# Altium PCB PCB2.PcbDoc (part 1 of 2)
Units mm, origin at the board's own origin, x right, y up, seen from the top; angles counter-clockwise.
Board outline 147.4 x 113.58 mm, 2 copper layers (Top Layer, Bottom Layer); 216 components, 177 nets, 669 pads, 177 vias.
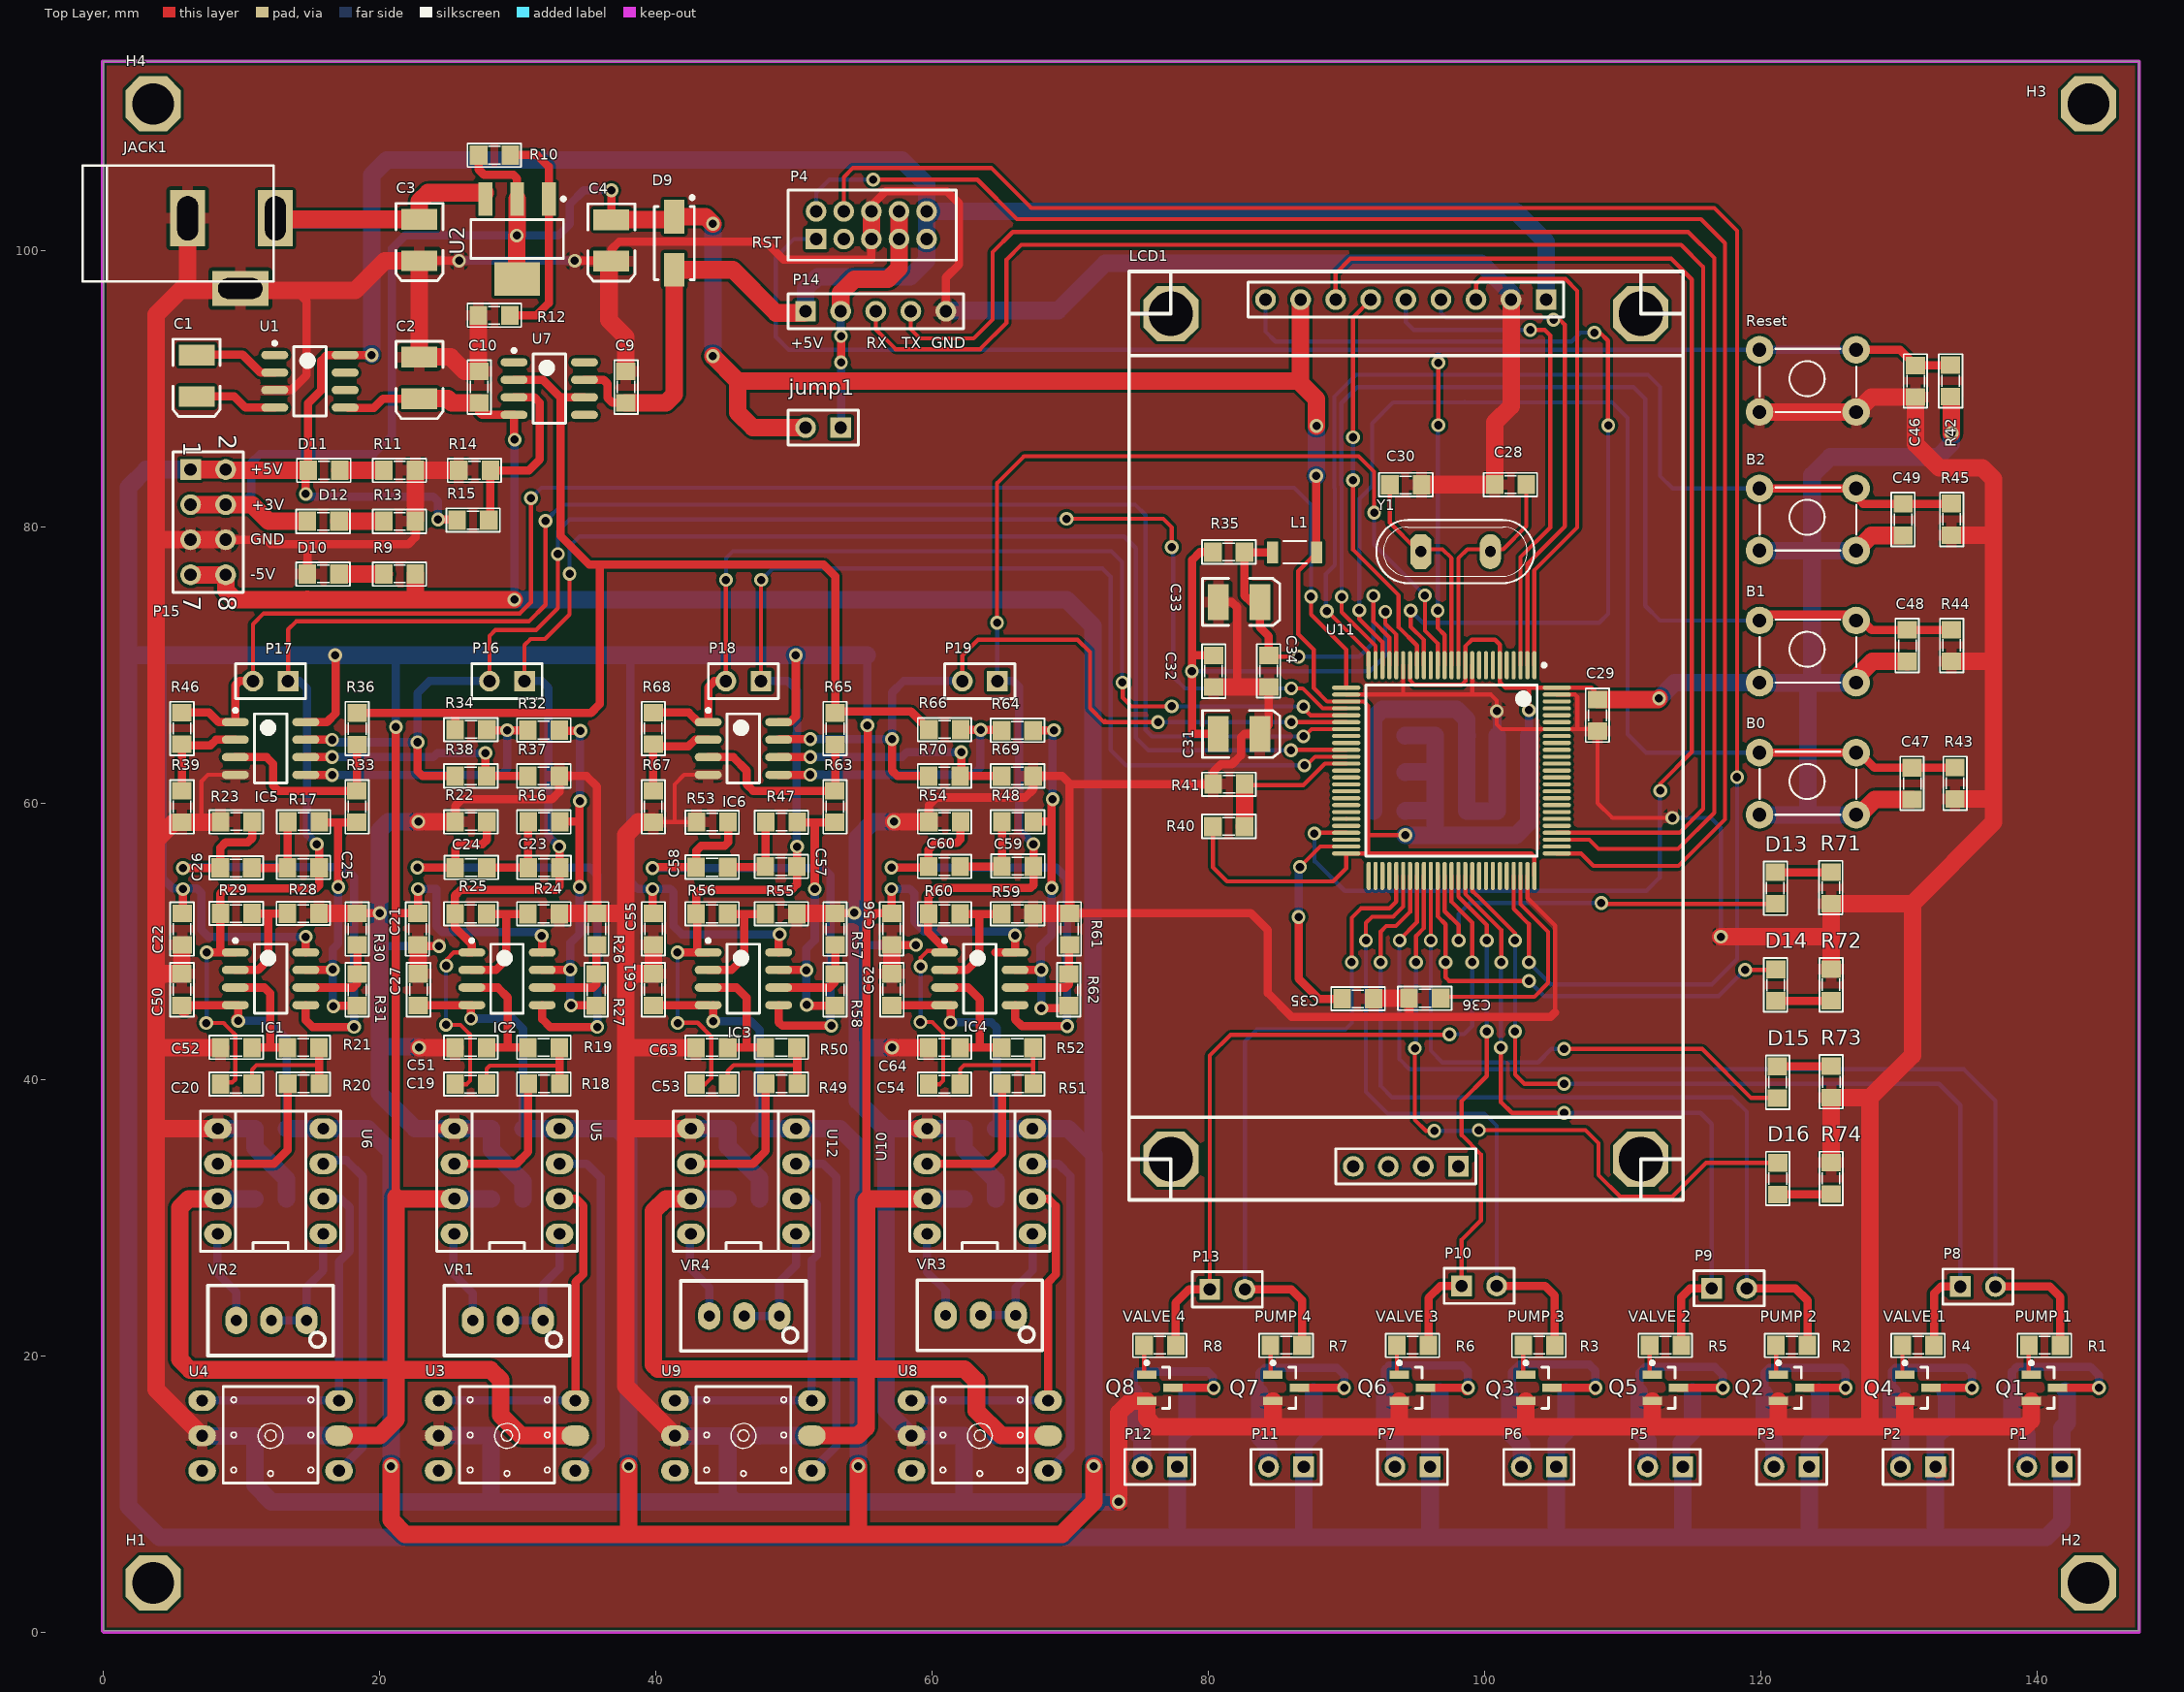
[diagram p0: Top Layer view]
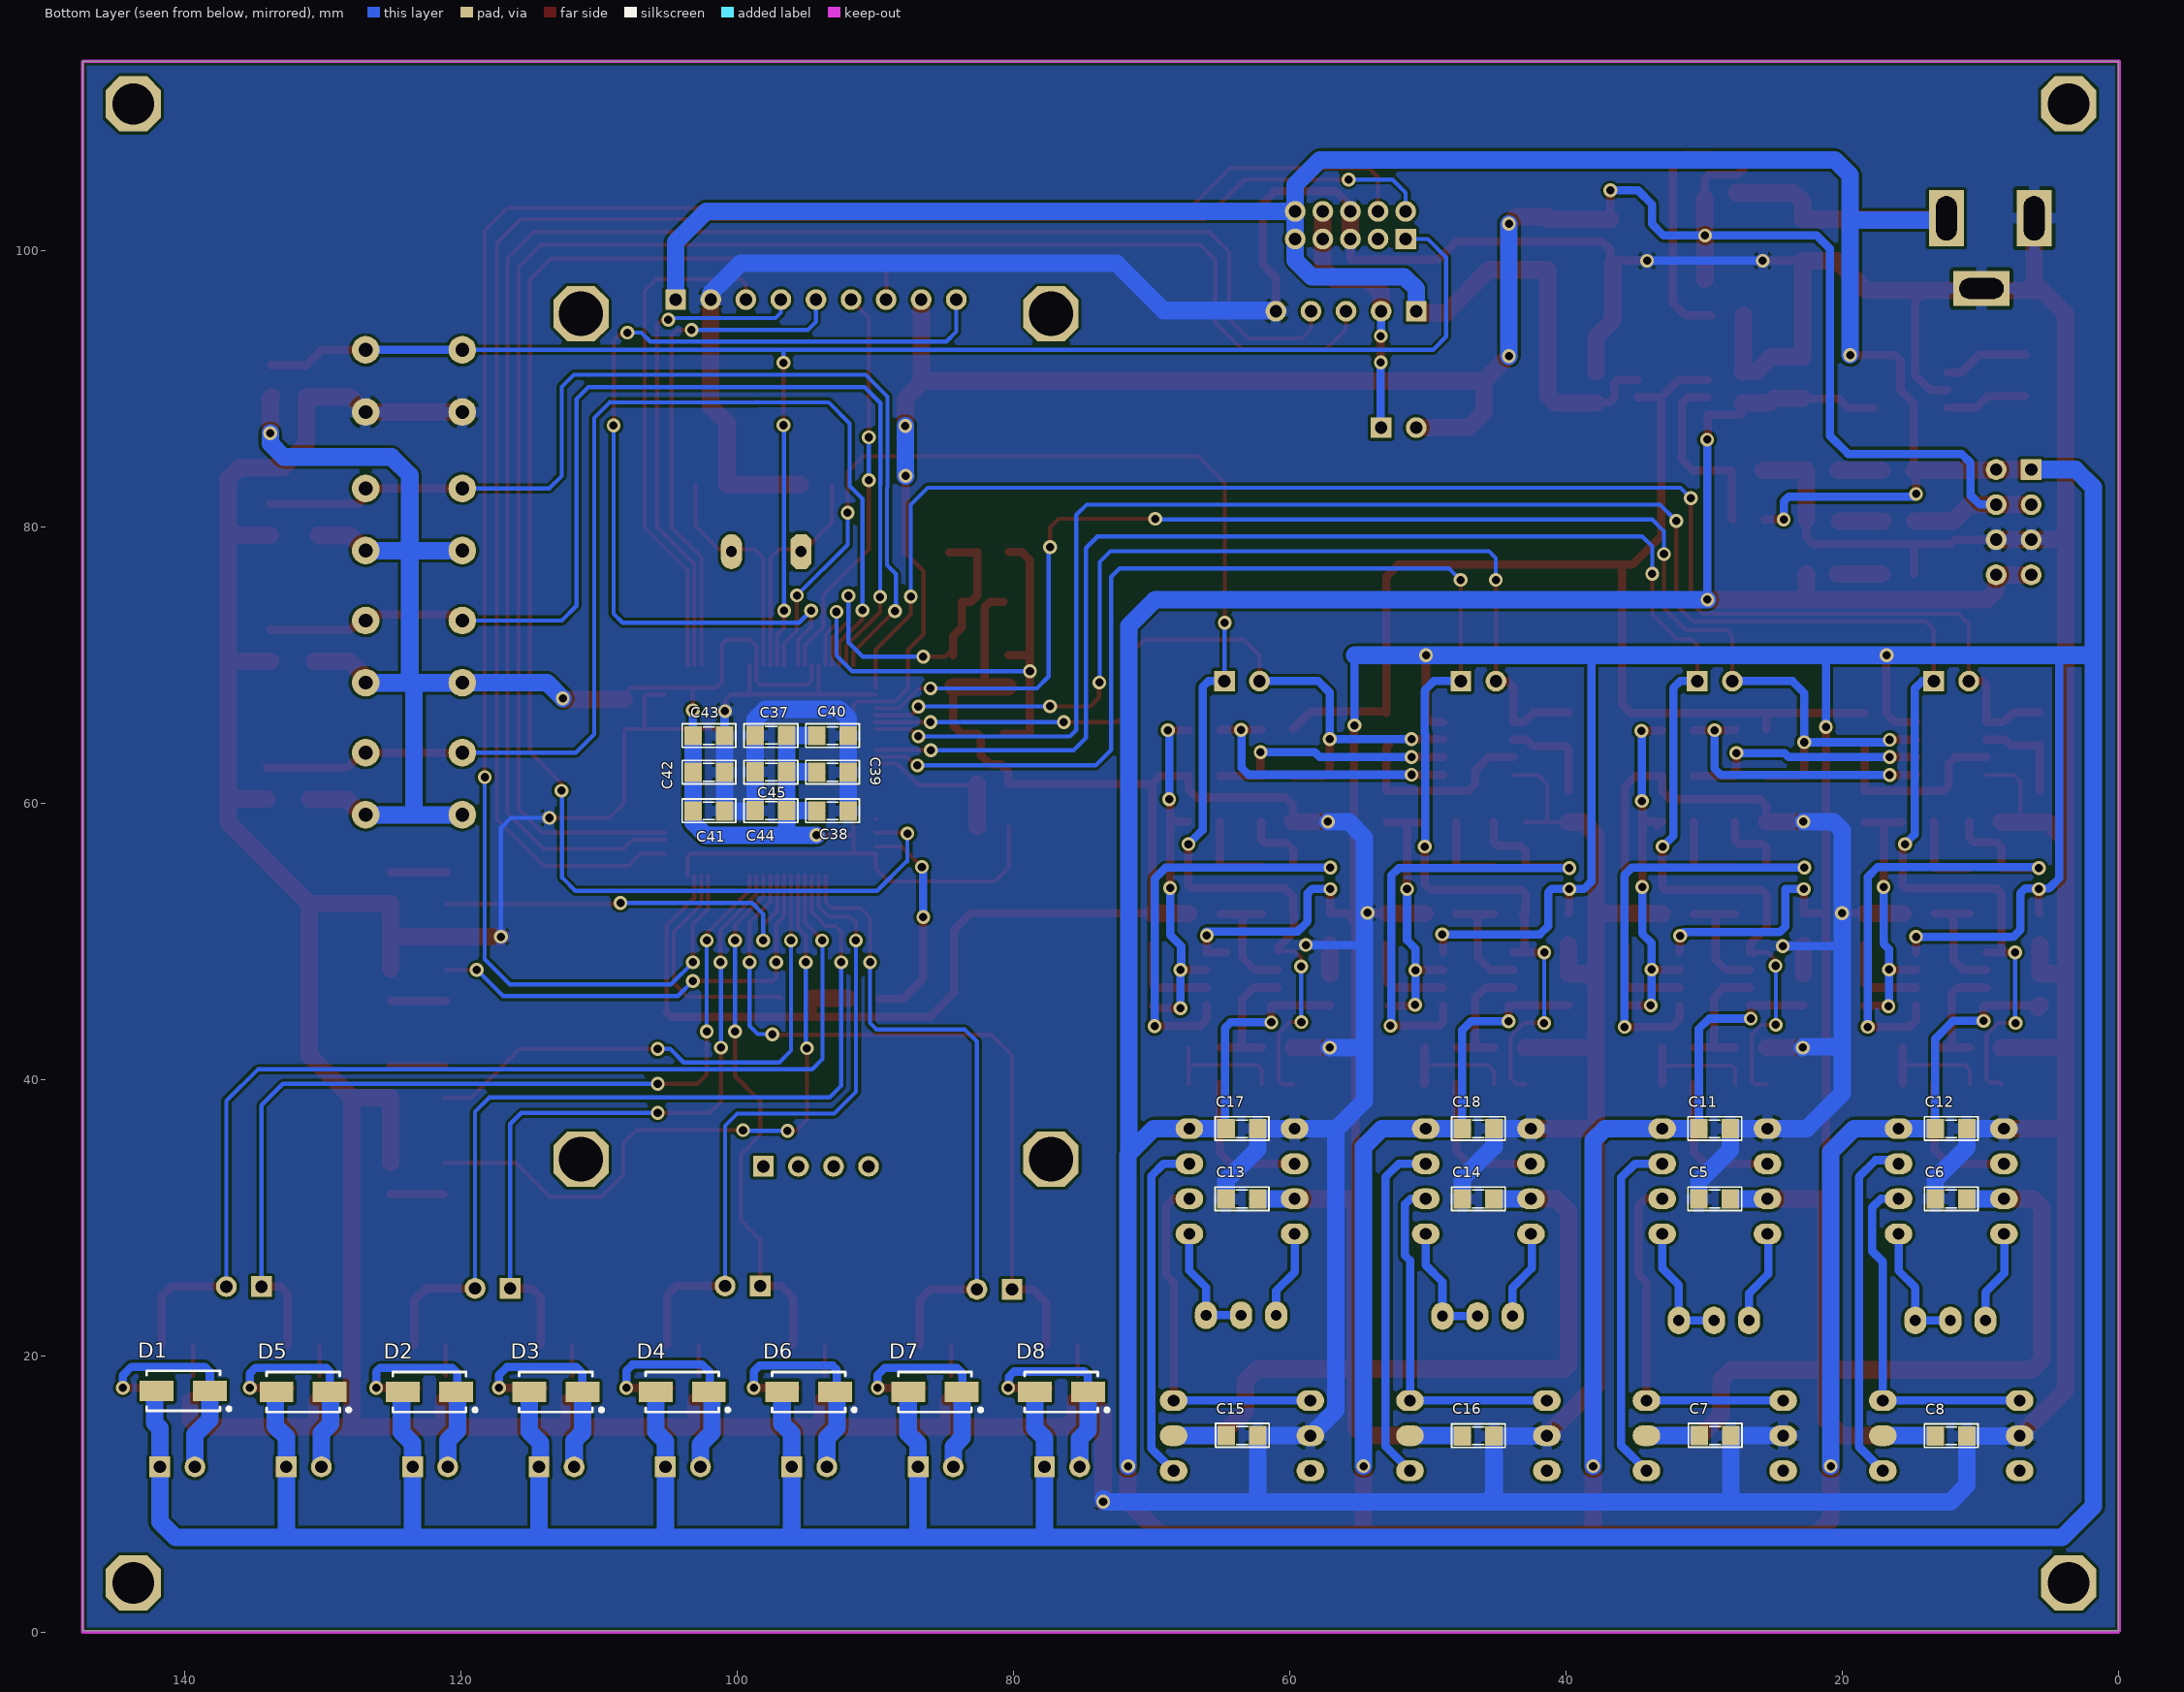
[diagram p1: Bottom Layer view, seen from below]

## Layer stack, top to bottom
Top Solder: solder mask 0.0102, Solder Resist, Dk 3.5
Top Layer: signal copper 0.0356
Dielectric 1: dielectric 0.32, FR-4, Dk 4.8
Bottom Layer: signal copper 0.0356
Bottom Solder: solder mask 0.0102, Solder Resist, Dk 3.5

## Board outline
0,0.1 147.4,0.1 147.4,113.675 0,113.675

## Design rules (kind name [scope] priority, off if disabled: settings)
Clearance Clearance_3 [InNamedPolygon('GND_L01_P006')] p1: gap=0.2 ignorepadtopadclearanceinfootprint=FALSE
Clearance Clearance_2 [InNamedPolygon('GND_L02_P007')] p2: gap=0.2 ignorepadtopadclearanceinfootprint=FALSE
Clearance Clearance_1 [InNamedPolygon('GND_L02_P007')] p3: gap=0.2 ignorepadtopadclearanceinfootprint=FALSE
Clearance [All] p4: gap=0.2 ignorepadtopadclearanceinfootprint=FALSE
PolygonConnect [All] p1: connectstyle=Relief reliefconductorwidth=0.8 reliefentries=4 polygonreliefangle="90 Angle" airgapwidth=0.254
RoutingVias [All] p1: holewidth=0.6 width=1 viastyle="Through Hole" minholewidth=0.6 minwidth=1 maxholewidth=0.6 maxwidth=1
SolderMaskExpansion [All] p1: expansion=0.102
Width [All] p1: maxlimit=1.27 minlimit=0.3 preferedwidth=0.6
30 further rules are at their usual default settings.

## Classes and differential pairs
component class Sheet3: C5 C6 C7 C8 C9 C10 C11 C12 C13 C14 C15 C16 C17 C18 C19 C20 C21 C22 C23 C24 C25 C26 C27 C50 C51 C52 C53 C54 C55 C56 C57 C58 C59 C60 C61 C62 C63 C64 IC1 IC2 IC3 IC4 IC5 IC6 P16 P17 P18 P19 R14 R15 R16 R17 R18 R19 R20 R21 R22 R23 R24 R25 R26 R27 R28 R29 R30 R31 R32 R33 R34 R36 R37 R38 R39 R46 R47 R48 R49 R50 R51 R52 R53 R54 R55 R56 R57 R58 R59 R60 R61 R62 R63 R64 R65 R66 R67 R68 R69 R70 U3 U4 U5 U6 U7 U8 U9 U10 U12 VR1 VR2 VR3 VR4
component class Sheet1: D1 D2 D3 D4 D5 D6 D7 D8 LCD1 P1 P2 P3 P5 P6 P7 P8 P9 P10 P11 P12 P13 Q1 Q2 Q3 Q4 Q5 Q6 Q7 Q8 R1 R2 R3 R4 R5 R6 R7 R8
component class Sheet2: B0 B1 B2 C1 C2 C3 C4 C28 C29 C30 C31 C32 C33 C34 C35 C36 C37 C38 C39 C40 C41 C42 C43 C44 C45 C46 C47 C48 C49 D9 D10 D11 D12 D13 D14 D15 D16 H1 H2 H3 H4 JACK1 jump1 L1 P4 P14 P15 R9 R10 R11 R12 R13 R35 R40 R41 R42 R43 R44 R45 R71 R72 R73 R74 Reset U1 U2 U11 Y1

## Components (designator, comment, footprint, x,y, rotation, side; value= is the part's Value field where it differs from the comment)
B0 "B0" "SW 4PIN" 126.9,59.15 r180 top
B1 "SWITCH" "SW 4PIN" 126.9,68.712 r180 top
B2 "SWITCH" "SW 4PIN" 126.9,78.275 r180 top
C1 "10uF" 3.5X2.8X1.9 6.741,90.925 r270 top
C2 "10uF" 3.5X2.8X1.9 22.875,90.775 r270 top
C3 "0.1uF" 3.5X2.8X1.9 22.875,100.75 r270 top
C4 "1uF" 3.5X2.8X1.9 36.775,100.725 r270 top
C5 "104" "0805 CAP" 29.229,31.342 r0 bottom
C6 "104" "0805 CAP" 12.113,31.342 r0 bottom
C7 "104" "0805 CAP" 29.204,14.223 r0 bottom
C8 "104" "0805 CAP" 12.113,14.197 r0 bottom
C9 "104" "0805 CAP" 37.825,90.115 r90 top
C10 "104" "0805 CAP" 27.197,90.115 r90 top
C11 "104" "0805 CAP" 29.229,36.422 r0 bottom
C12 "104" "0805 CAP" 12.113,36.422 r0 bottom
C13 "104" "0805 CAP" 63.463,31.342 r0 bottom
C14 "104" "0805 CAP" 46.346,31.342 r0 bottom
C15 "104" "0805 CAP" 63.437,14.223 r0 bottom
C16 "104" "0805 CAP" 46.346,14.197 r0 bottom
C17 "104" "0805 CAP" 63.463,36.422 r0 bottom
C18 "104" "0805 CAP" 46.346,36.422 r0 bottom
C19 "1uF" "0805 CAP" 26.593,39.65 r180 top
C20 "1uF" "0805 CAP" 9.607,39.65 r180 top
C21 "104" "0805 CAP" 22.75,50.875 r270 top
C22 "104" "0805 CAP" 5.7,50.875 r270 top
C23 "10uF" "0805 CAP" 31.893,55.325 r180 top
C24 "10uF" "0805 CAP" 26.618,55.325 r180 top
C25 "10uF" "0805 CAP" 14.475,55.325 r180 top
C26 "10uF" "0805 CAP" 9.6,55.3 r180 top
C27 "104" "0805 CAP" 22.8,46.5 r90 top
C28 "20pF" "0805 CAP" 101.872,83.05 r0 top
C29 "104" "0805 CAP" 108.175,66.35 r270 top
C30 "20pF" "0805 CAP" 94.278,83.025 r180 top
C31 "1uF" 3.5X2.8X1.9 82.224,65 r0 top
C32 "100nF" "0805 CAP" 80.376,69.55 r90 top
C33 "1uF" 3.5X2.8X1.9 82.224,74.55 r0 top
C34 "100nF" "0805 CAP" 84.372,69.55 r270 top
C35 "20pF" "0805 CAP" 90.825,45.825 r180 top
C36 "20pF" "0805 CAP" 95.675,45.875 r0 top
C37 "100nF" "0805 CAP" 97.55,64.9 r180 bottom
C38 "100nF" "0805 CAP" 93.1,59.425 r0 bottom
C39 "100nF" "0805 CAP" 93.1,62.225 r0 bottom
C40 "100nF" "0805 CAP" 93.1,64.875 r0 bottom
C41 "100nF" "0805 CAP" 102.05,59.425 r0 bottom
C42 "100nF" "0805 CAP" 102.05,62.225 r0 bottom
C43 "100nF" "0805 CAP" 102.05,64.875 r0 bottom
C44 "100nF" "0805 CAP" 97.55,59.45 r180 bottom
C45 "1uF" "0805 CAP" 97.55,62.25 r180 bottom
C46 "100nF" "0805 CAP" 131.2,90.537 r270 top
C47 "104" "0805 CAP" 130.95,61.413 r270 top
C48 "104" "0805 CAP" 130.6,71.387 r270 top
C49 "104" "0805 CAP" 130.3,80.512 r270 top
C50 "104" "0805 CAP" 5.675,46.5 r90 top
C51 "1uF" "0805 CAP" 26.593,42.3 r180 top
C52 "1uF" "0805 CAP" 9.607,42.3 r180 top
C53 "1uF" "0805 CAP" 44.057,39.65 r180 top
C54 "1uF" "0805 CAP" 60.882,39.65 r180 top
C55 "104" "0805 CAP" 39.825,50.883 r270 top
C56 "104" "0805 CAP" 57.075,50.883 r270 top
C57 "10uF" "0805 CAP" 49.068,55.4 r180 top
C58 "10uF" "0805 CAP" 44.057,55.35 r180 top
C59 "10uF" "0805 CAP" 66.193,55.425 r180 top
C60 "10uF" "0805 CAP" 60.882,55.4 r180 top
C61 "104" "0805 CAP" 39.8,46.5 r90 top
C62 "104" "0805 CAP" 57.075,46.5 r90 top
C63 "1uF" "0805 CAP" 44.057,42.3 r180 top
C64 "1uF" "0805 CAP" 60.882,42.3 r180 top
D1 "Diode" "DIODE SMA" 140.1,17.45 r0 bottom
D2 "Diode" "DIODE SMA" 122.275,17.375 r0 bottom
D3 "Diode" "DIODE SMA" 113.125,17.375 r0 bottom
D4 "Diode" "DIODE SMA" 103.975,17.375 r0 bottom
D5 "Diode" "DIODE SMA" 131.425,17.375 r0 bottom
D6 "Diode" "DIODE SMA" 94.825,17.375 r0 bottom
D7 "Diode" "DIODE SMA" 85.675,17.375 r0 bottom
D8 "Diode" "DIODE SMA" 76.525,17.375 r0 bottom
D9 "1n4002" "DIODE SMA" 41.325,100.525 r270 top
D10 "LED" "LED SMD 0805" 15.925,76.653 r0 top
D11 "LED" "LED SMD 0805" 15.975,84.15 r0 top
D12 "LED" "LED SMD 0805" 15.925,80.463 r0 top
D13 "LED" "LED SMD 0805" 120.981,53.857 r90 top
D14 "LED" "LED SMD 0805" 121.138,46.809 r270 top
D15 "LED" "LED SMD 0805" 121.138,39.807 r90 top
D16 "LED" "LED SMD 0805" 121.294,32.805 r270 top
H1 "HOLE" HOLE 3.6,3.55 r0 top
H2 "HOLE" HOLE 143.725,3.55 r0 top
H3 "HOLE" HOLE 143.725,110.6 r0 top
H4 "HOLE" HOLE 3.6,110.6 r0 top
IC1 "LM358" "SOIC 8PIN" 12.1,47.281 r0 top
IC2 "LM358" "SOIC 8PIN" 29.217,47.281 r0 top
IC3 "LM358" "SOIC 8PIN" 46.333,47.281 r0 top
IC4 "LM358" "SOIC 8PIN" 63.45,47.281 r0 top
IC5 "LM358" "SOIC 8PIN" 12.1,63.95 r0 top
IC6 "LM358" "SOIC 8PIN" 46.333,63.95 r0 top
JACK1 "JACK DC" "JACK DC" 9.275,99.785 r0 top value="Jac DC"
jump1 "Header 2H" HDR1X2 53.375,87.175 r180 top
L1 "100uH" "1206 Negro" 86.25,78.137 r180 top
LCD1 "LCD TFT 2.2\"" "LCD TFT 2.2\"" 104.453,96.441 r180 top
P1 "Pump" HDR1X2 141.795,11.95 r180 top
P2 "Valve" HDR1X2 132.645,11.95 r180 top
P3 "Pump" HDR1X2 123.495,11.95 r180 top
P4 "Header 5X2" "HDR2X5 2mm" 51.597,100.825 r0 top
P5 "Valve" HDR1X2 114.345,11.95 r180 top
P6 "Pump" HDR1X2 105.195,11.95 r180 top
P7 "Valve" HDR1X2 96.045,11.95 r180 top
P8 "Header 2H" HDR1X2 134.44,25 r0 top
P9 "Header 2H" HDR1X2 116.435,24.875 r0 top
P10 "Header 2H" HDR1X2 98.335,25.05 r0 top
P11 "Pump" HDR1X2 86.895,11.95 r180 top
P12 "Valve" HDR1X2 77.745,11.95 r180 top
P13 "Header 2H" HDR1X2 80.1,24.8 r0 top
P14 "Header 5" HDR1X5 50.835,95.6 r0 top
P15 "Header 4X2" HDR2X4 6.311,84.14 r270 top
P16 "Header 2H" HDR1X2 30.487,68.825 r180 top
P17 "Header 2H" HDR1X2 13.365,68.825 r180 top
P18 "Header 2H" HDR1X2 47.603,68.825 r180 top
P19 "Header 2H" HDR1X2 64.72,68.825 r180 top
Q1 "NPN" "SOT23 - 3PIN" 140.525,17.675 r0 top
Q2 "NPN" "SOT23 - 3PIN" 122.225,17.675 r0 top
Q3 "NPN" "SOT23 - 3PIN" 103.925,17.675 r0 top
Q4 "NPN" "SOT23 - 3PIN" 131.375,17.675 r0 top
Q5 "NPN" "SOT23 - 3PIN" 113.075,17.675 r0 top
Q6 "NPN" "SOT23 - 3PIN" 94.775,17.675 r0 top
Q7 "NPN" "SOT23 - 3PIN" 85.625,17.675 r0 top
Q8 "NPN" "SOT23 - 3PIN" 76.475,17.675 r0 top
R1 "220" "0805 RESISTOR" 139.395,20.75 r0 top value="R1/4W - 1K"
R2 "220" "0805 RESISTOR" 121.095,20.75 r0 top value="R1/4W - 1K"
R3 "220" "0805 RESISTOR" 102.795,20.75 r0 top value="R1/4W - 1K"
R4 "220" "0805 RESISTOR" 130.245,20.75 r0 top value="R1/4W - 1K"
R5 "220" "0805 RESISTOR" 111.945,20.75 r0 top value="R1/4W - 1K"
R6 "220" "0805 RESISTOR" 93.645,20.75 r0 top value="R1/4W - 1K"
R7 "220" "0805 RESISTOR" 84.495,20.75 r0 top value="R1/4W - 1K"
R8 "220" "0805 RESISTOR" 75.345,20.75 r0 top value="R1/4W - 1K"
R9 "10k" "0805 RESISTOR" 20.3,76.588 r0 top value="R1/4W - 1K"
R10 "330" "0805 RESISTOR" 27.164,106.9 r0 top value="R1/4W - 1K"
R11 "10k" "0805 RESISTOR" 20.3,84.085 r0 top value="R1/4W - 1K"
R12 "470" "0805 RESISTOR" 29.432,95.3 r180 top value="R1/4W - 1K"
R13 "10k" "0805 RESISTOR" 20.3,80.397 r0 top value="R1/4W - 1K"
R14 "2.2k" "0805 RESISTOR" 25.725,84.085 r0 top value="R1/4W - 1K"
R15 "10k" "0805 RESISTOR" 27.9,80.475 r180 top value="R1/4W - 1K"
R16 "33k" "0805 RESISTOR" 30.75,58.65 r0 top value="R1/4W - 1K"
R17 "33k" "0805 RESISTOR" 13.357,58.65 r0 top value="R1/4W - 1K"
R18 "33k" "0805 RESISTOR" 30.75,39.675 r0 top value="R1/4W - 1K"
R19 "33k" "0805 RESISTOR" 33.011,42.3 r180 top value="R1/4W - 1K"
R20 "33k" "0805 RESISTOR" 13.339,39.675 r0 top value="R1/4W - 1K"
R21 "33k" "0805 RESISTOR" 15.6,42.3 r180 top value="R1/4W - 1K"
R22 "33K" "0805 RESISTOR" 25.475,58.65 r0 top value="R1/4W - 1K"
R23 "33K" "0805 RESISTOR" 8.489,58.65 r0 top value="R1/4W - 1K"
R24 "10k" "0805 RESISTOR" 33.011,51.975 r180 top value="R1/4W - 1K"
R25 "5.6k" "0805 RESISTOR" 27.736,51.975 r180 top value="R1/4W - 1K"
R26 "10k" "0805 RESISTOR" 35.725,52.026 r270 top value="R1/4W - 1K"
R27 "5.6k" "0805 RESISTOR" 35.675,47.618 r270 top value="R1/4W - 1K"
R28 "10k" "0805 RESISTOR" 15.6,52 r180 top value="R1/4W - 1K"
R29 "5.6k" "0805 RESISTOR" 10.75,52 r180 top value="R1/4W - 1K"
R30 "10k" "0805 RESISTOR" 18.375,52.018 r270 top value="R1/4W - 1K"
R31 "5.6k" "0805 RESISTOR" 18.375,47.618 r270 top value="R1/4W - 1K"
R32 "10k" "0805 RESISTOR" 33.011,65.275 r180 top value="R1/4W - 1K"
R33 "10k" "0805 RESISTOR" 18.35,58.599 r90 top value="R1/4W - 1K"
R34 "10k" "0805 RESISTOR" 25.475,65.325 r0 top value="R1/4W - 1K"
R35 "1k" "0805 RESISTOR" 82.611,78.16 r180 top value="R1/4W - 1K"
R36 "10k" "0805 RESISTOR" 18.375,66.525 r270 top value="R1/4W - 1K"
R37 "10k" "0805 RESISTOR" 33.011,61.95 r180 top value="R1/4W - 1K"
R38 "10k" "0805 RESISTOR" 27.736,61.95 r180 top value="R1/4W - 1K"
R39 "10k" "0805 RESISTOR" 5.675,58.599 r90 top value="R1/4W - 1K"
R40 "10k" "0805 RESISTOR" 82.611,58.3 r180 top value="R1/4W - 1K"
R41 "510" "0805 RESISTOR" 80.35,61.375 r0 top value="R1/4W - 1K"
R42 "10k" "0805 RESISTOR" 133.725,89.42 r90 top value="R1/4W - 1K"
R43 "10k" "0805 RESISTOR" 134.05,60.295 r90 top value="R1/4W - 1K"
R44 "10k" "0805 RESISTOR" 133.8,70.27 r90 top value="R1/4W - 1K"
R45 "10k" "0805 RESISTOR" 133.8,79.395 r90 top value="R1/4W - 1K"
R46 "10k" "0805 RESISTOR" 5.675,64.264 r90 top value="R1/4W - 1K"
R47 "33k" "0805 RESISTOR" 47.95,58.625 r0 top value="R1/4W - 1K"
R48 "33k" "0805 RESISTOR" 65.05,58.65 r0 top value="R1/4W - 1K"
R49 "33k" "0805 RESISTOR" 47.95,39.675 r0 top value="R1/4W - 1K"
R50 "33k" "0805 RESISTOR" 50.211,42.3 r180 top value="R1/4W - 1K"
R51 "33k" "0805 RESISTOR" 65.05,39.675 r0 top value="R1/4W - 1K"
R52 "33k" "0805 RESISTOR" 67.311,42.3 r180 top value="R1/4W - 1K"
R53 "33K" "0805 RESISTOR" 42.939,58.625 r0 top value="R1/4W - 1K"
R54 "33K" "0805 RESISTOR" 59.764,58.65 r0 top value="R1/4W - 1K"
R55 "10k" "0805 RESISTOR" 50.211,51.975 r180 top value="R1/4W - 1K"
R56 "5.6k" "0805 RESISTOR" 45.2,51.975 r180 top value="R1/4W - 1K"
R57 "10k" "0805 RESISTOR" 52.975,52.018 r270 top value="R1/4W - 1K"
R58 "5.6k" "0805 RESISTOR" 52.975,47.618 r270 top value="R1/4W - 1K"
R59 "10k" "0805 RESISTOR" 67.311,51.975 r180 top value="R1/4W - 1K"
R60 "5.6k" "0805 RESISTOR" 62.025,51.975 r180 top value="R1/4W - 1K"
R61 "10k" "0805 RESISTOR" 69.95,52.026 r270 top value="R1/4W - 1K"
R62 "5.6k" "0805 RESISTOR" 69.9,47.618 r270 top value="R1/4W - 1K"
R63 "10k" "0805 RESISTOR" 52.95,58.599 r90 top value="R1/4W - 1K"
R64 "10k" "0805 RESISTOR" 67.311,65.25 r180 top value="R1/4W - 1K"
R65 "10k" "0805 RESISTOR" 52.975,66.525 r270 top value="R1/4W - 1K"
R66 "10k" "0805 RESISTOR" 59.764,65.325 r0 top value="R1/4W - 1K"
R67 "10k" "0805 RESISTOR" 39.8,58.599 r90 top value="R1/4W - 1K"
R68 "10k" "0805 RESISTOR" 39.8,64.264 r90 top value="R1/4W - 1K"
R69 "10k" "0805 RESISTOR" 67.311,61.95 r180 top value="R1/4W - 1K"
R70 "10k" "0805 RESISTOR" 62.025,61.95 r180 top value="R1/4W - 1K"
R71 "10k" "0805 RESISTOR" 125.075,55.01 r270 top value="R1/4W - 1K"
R72 "10k" "0805 RESISTOR" 125.075,45.702 r90 top value="R1/4W - 1K"
R73 "10k" "0805 RESISTOR" 125.1,40.96 r270 top value="R1/4W - 1K"
R74 "10k" "0805 RESISTOR" 125.075,31.697 r90 top value="R1/4W - 1K"
Reset "" "SW 4PIN" 126.9,88.3 r180 top
U1 "ICL7660" "SOIC 8PIN" 14.95,90.525 r0 top
U2 "LM317" SOT223-4N 29.95,100.825 r270 top
U3 "MPS20N0040D" MPS20N0040D-S 24.264,11.67 r90 top
U4 "MPS20N0040D" MPS20N0040D-S 7.147,11.67 r90 top
U5 "INA-129" "DIP 8" 29.217,32.625 r90 top
U6 "INA-129" "DIP 8" 12.1,32.625 r90 top
U7 "LM741" "SOIC 8PIN" 32.275,90 r0 top
U8 "MPS20N0040D" MPS20N0040D-S 58.497,11.67 r90 top
U9 "MPS20N0040D" MPS20N0040D-S 41.38,11.67 r90 top
U10 "INA-129" "DIP 8" 63.45,32.625 r90 top
U11 "STM32F40xxx-LQFP100" "LQFP 100PIN" 97.6,62.35 r270 top
U12 "INA-129" "DIP 8" 46.333,32.625 r90 top
VR1 "10K" RVAR 29.28,22.55 r180 top value="VR 10K"
VR2 "10K" RVAR 12.164,22.55 r180 top value="VR 10K"
VR3 "10K" RVAR 63.514,22.925 r180 top value="VR 10K"
VR4 "10K" RVAR 46.397,22.875 r180 top value="VR 10K"
Y1 "8Mhz" "CRYSTAL DIP" 97.875,78.2 r0 top

## Footprints (in the part's own frame and the unit in brackets; to place one, negate y for a bottom-side part, rotate by r counter-clockwise, add the part's x,y. Pads: shape width x height; smd on the part's side, far side on the other; paste and mask are expansions set on the pad)
3.5X2.8X1.9 [mm] "SM LED; 2 C-Bend Leads; Body 3.5 x 2.8 x 1.9 mm, inc leads (LxWxH typ)"
  rect 1.5x2.6 smd: 1(-1.5,0) 2(1.5,0)
  silkscreen extent -2.65,-1.7 2.95,1.7
"0805 CAP" [mil] "Compoment SMD 80x50mil"
  rect 50x55 smd: 1(-45,0) 2(45,0)
  silkscreen extent -77,-34 76,33, body extent -40,-25 40,25, height 24
"0805 RESISTOR" [mil] "Compoment SMD 80x50mil"
  rect 50x55 smd: 1(0,0) 2(90,0)
  silkscreen extent -32,-34 121,33, body extent 6,-25 84,25, height 24
"1206 Negro" [mm] "Chip Resistor, Empaque 1206"
  rect 0.8x1.6 smd: 1(-1.6,0) 2(1.6,0)
  silkscreen extent -0.85,-0.82 0.82,0.8, body extent -1.6,-0.8 1.6,0.8, height 1
"CRYSTAL DIP" [mm]
  oct 1.524x2.54 hole 0.8: 1(-2.5,0)
  oval 1.524x2.54 hole 0.8: 2(2.54,0)
  silkscreen extent -5.71,-2.29 5.71,2.29, body extent -5.63,-2.35 5.72,2.3, height 3.5
"DIODE SMA" [mm]
  rect 2.45x1.5 smd: 1(-1.925,0) 2(1.925,0)
  silkscreen extent -3.42,-1.45 2.65,1.45, body extent -2.8,-1.48 2.8,1.47, height 2.7
"DIP 8" [mm] "W.300/L.400"
  oval 1.5x2 hole 0.864: 1(-3.81,-3.81) 2(-1.27,-3.81) 3(1.27,-3.81) 4(3.81,-3.81) 5(3.81,3.81) 6(1.27,3.81) 7(-1.27,3.81) 8(-3.81,3.81)
  silkscreen extent -5.08,-5.08 5.08,5.08, body extent -5.4,-3.88 5.4,3.88, height 4.5
HDR1X2 [mm] "Connector; Header; 2 Position"
  rect 1.5x1.5 hole 0.9: 1(0,0)
  round 1.5 hole 0.9: 2(2.54,0)
  silkscreen extent -1.27,-1.27 3.81,1.27
HDR1X5 [mm] "Connector; Header; 5 Position"
  rect 1.5x1.5 hole 0.9: 1(0,0)
  round 1.5 hole 0.9: 2(2.54,0) 3(5.08,0) 4(7.62,0) 5(10.16,0)
  silkscreen extent -1.27,-1.27 11.43,1.27
HDR2X4 [mm] "Connector; Header; 4x2 Position"
  rect 1.5x1.5 hole 0.9: 1(0,0)
  round 1.5 hole 0.9: 2(0,2.54) 3(2.54,0) 4(2.54,2.54) 5(5.08,0) 6(5.08,2.54) 7(7.62,0) 8(7.62,2.54)
  silkscreen extent -1.27,-1.27 8.89,3.81
"HDR2X5 2mm" [mm] "Connector; Header; 5x2 Position"
  rect 1.5x1.5 hole 0.9: 1(0,0)
  round 1.5 hole 0.9: 2(0,2) 3(2,0) 4(2,2) 5(4,0) 6(4,2) 7(6,0) 8(6,2) 9(8,0) 10(8,2)
  silkscreen extent -2.03,-1.52 10.16,3.56, body extent -1.94,-1.48 10.06,3.52, height 6.6
HOLE [mm]
  oct 4x4 hole 3: H(0,0)
"JACK DC" [mm] "Jac DC input"
  rect 2.54x4.064 hole 1.5 slot 3.2 at 90 deg: 1(3.175,2.54) 2(-3.175,2.54)
  rect 4.064x2.54 hole 1.5 slot 3.2 at 0 deg: 3(0.635,-2.54)
  silkscreen extent -10.79,-2.03 3.05,6.35, body extent -10.42,-2.67 3.4,6.84, height 11.02
"LCD TFT 2.2\"" [mm]
  rect 1.5x1.5 hole 0.9: 1(0,0) 10(6.35,62.738)
  round 1.5 hole 0.9: 2(2.54,0) 3(5.08,0) 4(7.62,0) 5(10.16,0) 6(12.7,0) 7(15.24,0) 8(17.78,0) 9(20.32,0) 11(8.89,62.738) 12(11.43,62.738) 13(13.97,62.738)
  oct 4x4 hole 3.2: ""(-6.858,62.216) ""(-6.858,1.016) ""(27.178,62.216) ""(27.178,1.016)
  silkscreen extent -9.91,-2.03 30.19,65.17, body extent -9.89,-2.03 30.21,65.17, height 12
"LED SMD 0805" [mil] "Compoment SMD 80x50mil"
  rect 50x55 smd: 1(-45.39,-2.58) 2(44.61,-2.58)
  silkscreen extent -77,-37 76,30, body extent -41,-21 41,15, height 33
"LQFP 100PIN" [mm] "TSQFP, 100-Leads, Body 16.2x16.2mm (max), Pitch 0.50mm, IPC Low Density"
  oval 2.05x0.3 smd: 1(-7.625,6) 2(-7.625,5.5) 3(-7.625,5) 4(-7.625,4.5) 5(-7.625,4) 6(-7.625,3.5) 7(-7.625,3) 8(-7.625,2.5) 9(-7.625,2) 10(-7.625,1.5) 11(-7.625,1) 12(-7.625,0.5) 13(-7.625,0) 14(-7.625,-0.5) 15(-7.625,-1) 16(-7.625,-1.5) 17(-7.625,-2) 18(-7.625,-2.5) 19(-7.625,-3) 20(-7.625,-3.5) 21(-7.625,-4) 22(-7.625,-4.5) 23(-7.625,-5) 24(-7.625,-5.5) 25(-7.625,-6) 51(7.625,-6) 52(7.625,-5.5) 53(7.625,-5) 54(7.625,-4.5) 55(7.625,-4) 56(7.625,-3.5) 57(7.625,-3) 58(7.625,-2.5) 59(7.625,-2) 60(7.625,-1.5) 61(7.625,-1) 62(7.625,-0.5) 63(7.625,0) 64(7.625,0.5) 65(7.625,1) 66(7.625,1.5) 67(7.625,2) 68(7.625,2.5) 69(7.625,3) 70(7.625,3.5) 71(7.625,4) 72(7.625,4.5) 73(7.625,5) 74(7.625,5.5) 75(7.625,6)
  oval 0.3x2.05 smd: 26(-6,-7.625) 27(-5.5,-7.625) 28(-5,-7.625) 29(-4.5,-7.625) 30(-4,-7.625) 31(-3.5,-7.625) 32(-3,-7.625) 33(-2.5,-7.625) 34(-2,-7.625) 35(-1.5,-7.625) 36(-1,-7.625) 37(-0.5,-7.625) 38(0,-7.625) 39(0.5,-7.625) 40(1,-7.625) 41(1.5,-7.625) 42(2,-7.625) 43(2.5,-7.625) 44(3,-7.625) 45(3.5,-7.625) 46(4,-7.625) 47(4.5,-7.625) 48(5,-7.625) 49(5.5,-7.625) 50(6,-7.625) 76(6,7.625) 77(5.5,7.625) 78(5,7.625) 79(4.5,7.625) 80(4,7.625) 81(3.5,7.625) 82(3,7.625) 83(2.5,7.625) 84(2,7.625) 85(1.5,7.625) 86(1,7.625) 87(0.5,7.625) 88(0,7.625) 89(-0.5,7.625) 90(-1,7.625) 91(-1.5,7.625) 92(-2,7.625) 93(-2.5,7.625) 94(-3,7.625) 95(-3.5,7.625) 96(-4,7.625) 97(-4.5,7.625) 98(-5,7.625) 99(-5.5,7.625) 100(-6,7.625)
  silkscreen extent -7.75,-6.2 6.2,6.83, body extent -8.07,-8.07 8.07,8.07, height 1.62
MPS20N0040D-S [mm]
  oval 1.5x2 hole 0.864: 1(5.08,-9.906) 3(0,-9.906) 4(0,0) 5(2.54,0) 6(5.08,0)
  oval 1.5x2 all layers, no hole: 2(2.54,-9.906)
  silkscreen extent -0.89,-8.38 6.1,-1.52, body extent -0.96,-10.1 6.04,0.2, height 10
RVAR [mm] "Bien tro vi chinh"
  oval 1.6x2 hole 0.8: 1(-2.54,0) 2(0,0) 3(2.54,0)
  silkscreen extent -4.47,-2.54 4.6,2.54, body extent -4.54,-2.4 4.66,2.4, height 12.02
"SOIC 8PIN" [mm]
  oval 1.95x0.6 smd: 1(-2.55,1.905) 2(-2.55,0.635) 3(-2.55,-0.635) 4(-2.55,-1.905) 5(2.55,-1.905) 6(2.55,-0.635) 7(2.55,0.635) 8(2.55,1.905)
  silkscreen extent -2.67,-2.5 1.17,2.88, body extent -3,-2.45 3,2.45, height 1.75
"SOT23 - 3PIN" [mm]
  rect 1.4x0.6 smd: 1(-0.95,-0.95) 2(0.95,0) 3(-0.95,0.95)
  silkscreen extent -1.07,-1.5 0.7,1.92, body extent -1.4,-1.45 1.4,1.45, height 1.29
SOT223-4N [mm] "SOT223, 4-Leads, Body 6.5x3.5mm, Pitch 2.3mm, Lead Span 7mm, IPC Medium Density"
  rect 2.4x1 smd: 1(-2.9,2.3) 2(-2.9,0) 3(-2.9,-2.3)
  rect 2.4x3.3 smd: 4(2.9,0)
  silkscreen extent -3.02,-3.35 1.4,3.48, body extent -3.39,-3.27 3.5,3.23, height 1.72
"SW 4PIN" [mm] "SW button 4pin, 250 x250 mil"
  round 2 hole 1: 1(0,0) 1(7,0) 2(0,-4.5) 2(7,-4.5)
  silkscreen extent 0,-4.57 6.98,0, body extent -0.52,-5.39 7.38,0.81, height 7

## Part data
B0 Reset: library part SWITCH, LatestRevisionDate=17-Jul-2002, LatestRevisionNote="Re-released for DXP Platform.", PackageReference=SPST-2, Published=24-Mar-1999, Publisher="Altium Limited"
C1 C2 C3 C4 C31 C33: library part CAPACITOR
C5 C6 C7 C8 C9 C10 C11 C12 C13 C14 C15 C16 C17 C18 C19 C20 C21 C22 C23 C24 C25 C26 C27 C28 C29 C30 C32 C34 C35 C36 C37 C38 C39 C40 C41 C42 C43 C44 C45 C46 C47 C48 C49 C50 C51 C52 C53 C54 C55 C56 C57 C58 C59 C60 C61 C62 C63 C64: library part "CAP CERAMIC", LatestRevisionDate=17-Jul-2002, LatestRevisionNote="Re-released for DXP Platform.", PackageReference=RAD-0.3, Published=8-Jun-2000, Publisher="Altium Limited"
D1 D2 D3 D4 D5 D6 D7 D8 D9: library part DIODE
IC1 IC2 IC3 IC4 IC5 IC6: "Low-Power Dual Operational Amplifier"
L1: library part INDUCTOR
P1 P2 P3 P5 P6 P7 P11 P12: library part "Header 2H", LatestRevisionDate=17-Jul-2002, LatestRevisionNote="Re-released for DXP Platform.", Publisher="Altium Limited"
R1 R2 R3 R4 R5 R6 R7 R8 R9 R10 R11 R12 R13 R14 R15 R16 R17 R18 R19 R20 R21 R22 R23 R24 R25 R26 R27 R28 R29 R30 R31 R32 R33 R34 R35 R36 R37 R38 R39 R40 R41 R42 R43 R44 R45 R46 R47 R48 R49 R50 R51 R52 R53 R54 R55 R56 R57 R58 R59 R60 R61 R62 R63 R64 R65 R66 R67 R68 R69 R70 R71 R72 R73 R74: library part RESISTOR
U1: library part ICL7660SIBAZ, "ICL7660 Series 1.5 - 12 Vin 45 mA 10-35 kHz CMOS Voltage Converter - SOIC-8", Package="SOIC-8 Intersil", Availability=Unavailable, MF="Renesas Electronics", MP=ICL7660SIBAZ, Price=None, SnapEDA_Link=https://www.snapeda.com/parts/ICL7660SIBAZ/Renesas%20Electronics%20America%20Inc./view-part/?ref=snap
VR1 VR2 VR3 VR4: library part "VAR RES"
Y1: library part Crystal, LatestRevisionDate=17-Jul-2002, LatestRevisionNote="Re-released for DXP Platform.", PackageReference=R38, Published=8-Jun-2000, Publisher="Altium Limited"
B1 B2: LatestRevisionDate=17-Jul-2002, LatestRevisionNote="Re-released for DXP Platform.", PackageReference=SPST-2, Published=24-Mar-1999, Publisher="Altium Limited"
jump1 P4 P8 P9 P10 P13 P14 P15 P16 P17 P18 P19: LatestRevisionDate=17-Jul-2002, LatestRevisionNote="Re-released for DXP Platform.", Publisher="Altium Limited"

## Via types
v1: diameter 1, hole 0.6, Top Layer to Bottom Layer, 177 vias

## Nets (pads, with @x,y where several pads share a name; then routed paths per layer and width w, separated by ;. In a path a pad name is that pad's centre, name@x,y a point inside that pad or via, vN(x,y) a via of type N, cw(c..) or ccw(c..) an arc to the next point about the centre after c; other vN are vias at no path point)
+3.3V: jump1.1 P4.7 P4.8 P14.2 | length 18.8
  Top Layer w0.6: v1(53.4,91.9) v1(53.4,93.8)
  Top Layer w1.27: P14.2@53.375,95.6 53.375,96.925 54.375,97.925 56.8,97.925 57.597,98.722 P4.7@57.597,100.825 P4.8@57.597,102.825
  Bottom Layer w0.6: jump1.1@53.375,87.175 53.4,87.2 v1(53.4,91.9) ; P14.2@53.375,95.6 53.375,93.975 53.4,93.95 v1(53.4,93.8)
+3V: B0.1 B1.1 B2.1 C4.1 C29.1 C37.2 C38.2 C39.2 C40.2 C41.2 C42.2 C43.2 C44.2 C45.2 C47.2 C48.2 C49.2 D9.1 D12.1 jump1.2 L1.1 LCD1.8 P15.3 P15.4 R10.1 R40.2 R42.1 U2.2 U2.4 U11.6 U11.11 U11.19 U11.28 U11.50 U11.75 U11.100 | length 353.5
  Top Layer w0.3: R40.2@80.325,58.3 80.325,55.35 81.35,54.325 89.025,54.325 89.975,55.275 U11.50@89.975,56.35 91.575,56.35 ; L1.1@87.85,78.137 86.5,76.787 86.5,72.225 87.625,71.1 87.625,68.325 88.6,67.35 U11.28@89.975,67.35 91.25,67.35 91.575,67.025 91.575,57.7 ; v1(94.25,57.675) 91.6,57.675 91.575,57.7 ; U11.19@94.6,69.975 94.6,68.893 94.943,68.55 98.325,68.55 98.6,68.825 U11.11@98.6,69.975 98.6,71.35 99.075,71.825 100.75,71.825 101.1,71.475 U11.6@101.1,69.975 101.1,68.75 101.5,68.35 103.175,68.35 ; v1(103.2,66.725) 103.2,68.325 103.175,68.35 ; U11.75@103.6,54.725 103.6,56.125 103.375,56.35 91.575,56.35 ; C29.1@108.175,67.493 108.175,67.9 107.725,68.35 U11.100@105.225,68.35 103.175,68.35 ; 91.575,56.35 91.575,57.7
  Top Layer w0.6: R10.1@27.164,106.9 27.164,105.861 27.55,105.475 29.675,105.475 29.95,105.2 29.95,104.175 U2.2@29.925,104.15 ; C4.1@36.775,102.225 v1(36.775,104.35) ; v1(87.8,83.675) 87.8,78.187 L1.1@87.85,78.137
  Top Layer w1.27: P15.3@6.311,81.6 P15.4@8.851,81.6 10.75,81.6 11.953,80.397 D12.1@14.772,80.397 ; U2.4@29.95,97.925 29.925,97.95 v1(29.925,101.075) 29.95,101.1 U2.2@29.95,103.725 ; C4.1@36.775,102.225 D9.1@41.325,102.225 ; D9.1@41.325,102.45 43.6,102.45 v1(44.125,101.925) ; v1(44.125,92.35) 45.925,90.55 ; jump1.2@50.835,87.175 47.025,87.175 45.925,88.275 45.925,90.55 ; LCD1.8@86.673,96.441 86.673,90.398 ; v1(87.825,87.3) 87.825,89.246 86.673,90.398 ; C29.1@108.175,67.493 112.543,67.493 v1(112.625,67.575) ; B1.1@126.9,69.15 126.95,69.15 128.075,70.275 130.569,70.275 C48.2@130.6,70.244 ; B2.1@126.9,78.275 127.994,79.369 C49.2@130.3,79.369 ; B0.1@127.125,59.15 128.245,60.27 C47.2@130.95,60.27 ; R42.1@133.725,89.42 133.8,89.345 v1(133.8,86.775) ; 45.925,90.55 86.521,90.55 86.673,90.398
  Bottom Layer w0.6: P15.4@8.851,81.6 10.025,81.6 10.7,82.275 10.7,84.625 11.35,85.275 19.575,85.275 20.875,86.575 20.875,100.125 21.825,101.075 v1(29.925,101.075) 32.925,101.075 33.775,101.925 33.775,103.35 34.775,104.35 v1(36.775,104.35) ; v1@87.8,87.275 v1(87.825,87.3) ; C43.2@103.193,64.875 103.193,66.718 v1(103.2,66.725)
  Bottom Layer w1.27: v1(44.125,92.35) v1(44.125,101.925) ; v1(87.8,83.675) 87.825,83.7 v1(87.825,87.3) ; C38.2@94.243,59.425 94.268,59.45 C44.2@96.407,59.45 ; C39.2@94.243,62.225 94.268,62.25 C45.2@96.407,62.25 ; C40.2@94.243,64.875 94.268,64.9 C37.2@96.407,64.9 C45.2@96.407,62.25 ; v1(94.25,57.675) 96.75,57.675 ; C43.2@103.193,64.875 C42.2@103.193,62.225 C41.2@103.193,59.425 103.193,58.593 102.275,57.675 96.75,57.675 ; v1(112.625,67.575) 113.762,68.712 B1.1@119.9,68.712 119.912,68.7 123.7,68.7 ; B2.1@119.9,78.275 123.7,78.275 ; B0.1@120.125,59.15 123.4,59.15 123.4,68.4 123.7,68.7 ; 123.7,59.15 B0.1@127.125,59.15 ; B1.1@126.9,68.7 123.7,68.7 ; B2.1@126.9,78.275 123.7,78.275 ; v1(133.8,86.775) 133.8,86.025 132.825,85.05 125.025,85.05 123.7,83.725 123.7,78.275 ; C44.2@96.407,59.45 96.407,58.018 96.75,57.675 ; C44.2@96.407,59.45 C45.2@96.407,62.25 ; 123.7,68.7 123.7,78.275
+5V: C3.1 C5.1 C6.1 C7.2 C8.2 C9.1 C13.1 C14.1 C15.2 C16.2 C21.1 C22.1 C55.1 C56.1 D1.2 D2.2 D3.2 D4.2 D5.2 D6.2 D7.2 D8.2 D9.2 D11.1 IC1.8 IC2.8 IC3.8 IC4.8 IC5.8 IC6.8 JACK1.1 LCD1.1 P1.1 P2.1 P3.1 P4.9 P4.10 P5.1 P6.1 P7.1 P11.1 P12.1 P14.1 P15.1 P15.2 R15.2 U1.8 U2.3 U3.2 U4.2 U5.7 U6.7 U7.7 U8.2 U9.2 U10.7 U12.7 | length 926.6
  Top Layer w0.6: C22.1@5.7,52.018 5.75,52.068 v1(5.75,53.775) ; IC1.8@14.65,49.186 v1(14.65,50.325) ; IC5.8@14.65,65.855 16.18,65.855 16.825,66.5 v1@16.825,70.325 ; v1(14.65,82.375) 14.65,83.913 D11.1@14.822,84.085 14.822,88.947 15.775,89.9 15.775,92.025 16.18,92.43 U1.8@17.5,92.43 v1(19.42,92.43) ; 21.175,31.475 21.175,52.018 ; v1(21.175,65.5) 21.175,52.018 ; v1(22.775,53.775) 22.775,52.043 C21.1@22.75,52.018 21.175,52.018 ; v1(24.225,80.525) 25.564,80.525 R15.2@25.614,80.475 ; v1(31.725,50.392) 31.767,50.433 IC2.8@31.767,49.186 ; U7.7@34.825,90.635 36.215,90.635 36.5,90.35 36.5,89.325 36.853,88.972 C9.1@37.825,88.972 ; v1(39.75,53.775) 39.75,52.101 C55.1@39.825,52.026 ; IC3.8@48.883,49.186 48.883,50.433 v1(48.95,50.5) ; IC6.8@48.883,65.855 49.705,65.855 50.13,66.28 v1@50.13,70.325 ; 55.25,31.263 55.25,34.45 55.225,51.325 55.375,51.475 ; v1(55.3,65.625) 55.354,65.571 55.354,51.496 55.375,51.475 ; v1@57.075,53.775 C56.1@57.075,52.026 55.926,52.026 55.375,51.475 ; 64.561,49.186 IC4.8@66,49.186 ; v1(66,50.425) 66,49.215 IC4.8@66.029,49.186
  Top Layer w1.27: P15.1@6.311,84.14 P15.2@8.851,84.14 8.907,84.085 D11.1@14.822,84.085 ; U6.7@8.29,31.355 6.155,31.355 5.525,30.725 5.525,19.725 6.275,18.975 21.175,18.975 ; JACK1.1@12.425,102.15 12.525,102.25 C3.1@22.875,102.25 22.875,103.55 23.5,104.175 U2.3@27.635,104.175 ; U4.2@17.053,14.21 20.01,14.21 21.175,15.375 21.175,18.975 ; 21.175,31.35 21.175,18.975 ; 21.175,31.475 21.295,31.355 U5.7@25.407,31.355 ; U3.2@34.17,14.21 30.24,14.21 28.75,15.7 28.75,18.25 28.025,18.975 21.175,18.975 ; C9.1@37.825,88.972 40.722,88.972 41.325,89.575 D9.2@41.325,98.6 45.56,98.6 48.685,95.475 50.71,95.475 P14.1@50.835,95.6 ; U12.7@42.523,31.355 40.72,31.355 39.825,30.46 39.825,19.35 40.15,19.025 55.225,19.025 ; U9.2@51.286,14.21 54.635,14.21 55.225,14.8 55.225,19.025 ; 55.237,31.25 55.237,19.025 ; 55.25,31.263 55.343,31.355 U10.7@59.64,31.355 ; U8.2@68.403,14.21 65.015,14.21 63.2,16.025 63.2,18.175 62.35,19.025 55.237,19.025 ; P2.1@132.645,11.95 P2.1@132.825,11.77 ; 55.225,19.025 55.237,19.025
  Bottom Layer w0.6: 4.275,70.7 4.275,54.575 5.025,53.825 6.75,53.825 7.1,53.475 7.1,50.8 7.575,50.325 v1(14.65,50.325) ; v1(14.65,82.375) 14.85,82.175 23.875,82.175 24.225,81.825 v1(24.225,80.525) ; v1(21.175,65.5) 21.175,70.325 ; v1(22.775,53.775) 24.1,53.775 24.1,51.075 24.525,50.65 31.467,50.65 v1(31.725,50.392) ; 38.15,70.3 38.15,54.325 38.7,53.775 v1(39.75,53.775) ; v1@39.75,53.8 41.025,53.8 41.275,53.55 41.275,51.1 41.875,50.5 v1(48.95,50.5) ; v1(55.3,65.625) 55.3,70.7 ; v1@57.05,53.8 58.375,53.8 58.7,53.475 58.7,51.425 59.425,50.7 66.075,50.7 66,50.625 v1(66,50.425)
  Bottom Layer w1.27: P15.1@6.311,84.14 3.09,84.14 1.8,82.85 1.8,70.575 ; U6.7@8.29,31.355 8.303,31.342 C6.1@10.97,31.342 ; JACK1.1@12.45,102.2 19.37,102.2 19.42,102.15 ; C8.2@13.256,14.197 13.269,14.21 U4.2@17.053,14.21 ; v1(19.42,92.43) 19.42,102.15 ; U5.7@25.407,31.355 25.419,31.342 C5.1@28.086,31.342 ; C7.2@30.347,14.223 30.36,14.21 U3.2@34.17,14.21 ; U12.7@42.523,31.355 42.536,31.342 C14.1@45.203,31.342 ; C16.2@47.489,14.197 47.502,14.21 U9.2@51.286,14.21 ; P14.1@50.835,95.6 50.835,97.235 51.7,98.1 58.4,98.1 59.597,99.297 P4.9@59.597,100.825 P4.10@59.597,102.825 ; 55.3,70.7 v1(50.125,70.7) v1(16.775,70.7) 4.275,70.7 1.925,70.7 1.8,70.575 ; U10.7@59.64,31.355 59.653,31.342 C13.1@62.32,31.342 ; C15.2@64.58,14.223 64.593,14.21 U8.2@68.403,14.21 ; D8.2@78.45,17.375 78.45,14.75 77.745,14.045 P12.1@77.745,11.95 77.745,6.88 77.775,6.85 ; D7.2@87.6,17.375 87.625,17.35 87.625,14.375 86.895,13.645 P11.1@86.895,11.95 86.895,6.855 86.9,6.85 ; D6.2@96.75,17.375 96.75,15.05 96.045,14.345 P7.1@96.045,11.95 96.045,6.945 95.95,6.85 ; LCD1.1@104.453,96.441 104.453,100.622 102.25,102.825 P4.10@59.597,102.825 ; D4.2@105.9,17.375 105.9,14.5 105.195,13.795 P6.1@105.195,11.95 105.195,6.945 105.1,6.85 ; D3.2@115.05,17.375 115.05,14.5 114.25,13.7 114.25,12.045 P5.1@114.345,11.95 114.345,6.87 114.325,6.85 ; D2.2@124.2,17.375 124.3,17.275 124.3,14.475 123.495,13.67 P3.1@123.495,11.95 123.495,6.88 123.525,6.85 ; D5.2@133.35,17.375 133.425,17.3 133.425,14.9 132.645,14.12 P2.1@132.645,11.95 132.645,6.92 132.575,6.85 ; D1.2@142.025,17.45 142.175,17.3 142.175,15.125 141.795,14.745 P1.1@141.795,11.95 141.795,7.97 140.675,6.85 132.575,6.85 ; 1.8,70.575 1.8,9.1 4.05,6.85 77.775,6.85 ; 19.42,102.15 19.42,105.445 20.525,106.55 57.8,106.55 59.597,104.753 P4.10@59.597,102.825 ; 77.775,6.85 86.9,6.85 ; 86.9,6.85 95.95,6.85 ; 95.95,6.85 105.1,6.85 ; 105.1,6.85 114.325,6.85 ; 114.325,6.85 123.525,6.85 ; 123.525,6.85 132.575,6.85
  other v1: 57.05,53.775
-5V: C2.2 C10.1 C11.2 C12.2 C17.2 C18.2 C27.1 C50.1 C61.1 C62.1 IC1.4 IC2.4 IC3.4 IC4.4 P15.7 P15.8 R9.2 U1.5 U5.4 U6.4 U7.4 U10.4 U12.4 | length 391.1
  Top Layer w0.6: C50.1@5.675,45.357 5.694,45.376 IC1.4@9.55,45.376 ; v1@9.55,44.425 v1(9.75,44.225) ; v1@9.75,44.425 IC1.4@9.75,45.376 ; U1.5@17.72,88.6 19.575,88.6 20.25,89.275 C2.2@22.875,89.275 ; C27.1@22.8,45.357 22.819,45.376 IC2.4@26.667,45.376 ; v1@26.613,44.454 IC2.4@26.613,45.376 ; v1@26.625,44.4 v1(26.613,44.4) v1@26.667,44.454 ; C10.1@27.197,88.972 27.197,88.303 27.405,88.095 U7.4@29.725,88.095 29.725,86.35 v1(29.775,86.3) ; C61.1@39.8,45.357 43.765,45.357 IC3.4@43.783,45.376 ; v1(44.15,44.2) IC3.4@44.15,45.375 ; C62.1@57.075,45.357 57.094,45.376 61.35,45.376 61.35,44.15 v1(61.325,44.125)
  Top Layer w1.27: C50.1@5.675,45.357 C50.1@5.825,45.207 ; P15.7@6.311,76.52 P15.8@8.851,76.52 8.851,75.399 9.525,74.725 14.775,74.725 ; 14.747,74.753 14.775,74.725 ; v1(20.825,12) 20.825,8.1 21.85,7.075 37.925,7.075 ; R9.2@22.586,76.588 22.586,74.761 22.55,74.725 ; C2.2@22.875,89.275 24.925,89.275 25.228,88.972 C10.1@27.197,88.972 ; v1(29.75,74.725) 22.55,74.725 ; v1(38.025,12) 38.025,7.175 37.925,7.075 ; v1(54.65,12) 54.65,7.075 ; v1(71.7,12) 71.7,9.4 69.375,7.075 54.65,7.075 ; 14.775,74.725 22.55,74.725 ; 37.925,7.075 54.65,7.075
  Bottom Layer w0.6: v1(9.75,44.225) 11.975,44.225 13.256,42.944 C12.2@13.256,36.422 ; v1(26.613,44.4) 29.625,44.4 30.372,43.653 C11.2@30.372,36.422 ; v1@29.775,74.725 v1(29.775,86.3) ; v1(44.15,44.2) 46.875,44.2 47.502,43.573 47.502,36.435 C18.2@47.489,36.422 ; v1(61.325,44.125) 64.275,44.125 64.675,43.725 64.675,36.492 C17.2@64.606,36.422
  Bottom Layer w1.27: C12.2@13.256,36.422 15.897,36.422 U6.4@15.91,36.435 19.14,36.435 20.825,34.75 v1(20.825,12) ; v1(29.75,74.725) 29.775,74.725 69.75,74.725 71.65,72.825 71.65,34.625 ; C11.2@30.372,36.422 33.014,36.422 U5.4@33.027,36.435 37.165,36.435 38.025,35.575 v1(38.025,12) ; C18.2@47.502,36.435 U12.4@50.143,36.435 53.315,36.435 54.65,35.1 v1(54.65,12) ; C17.2@64.606,36.422 67.247,36.422 U10.4@67.26,36.435 69.84,36.435 71.65,34.625 ; v1(71.7,12) 71.7,34.575 71.65,34.625
BOOT1: R40.1 R41.2 U11.37 | length 10.6
  Top Layer w0.3: R41.2@83.086,61.3 86.877,61.3 88.427,62.85 U11.37@89.975,62.85
  Top Layer w1.27: R40.1@82.611,58.3 82.636,58.325 R41.2@82.636,61.375

## Text inside footprints (layer, text, board x,y; h text height)
P15: Top Overlay "2" at 8.343,86.68 h1.27 r270; Top Overlay "1" at 5.803,86.172 h1.27 r270; Top Overlay "7" at 5.803,74.996 h1.27 r270; Top Overlay "8" at 8.343,74.996 h1.27 r270